# EAGLE board NDS-JOYSTICK (EAGLE 6.4)
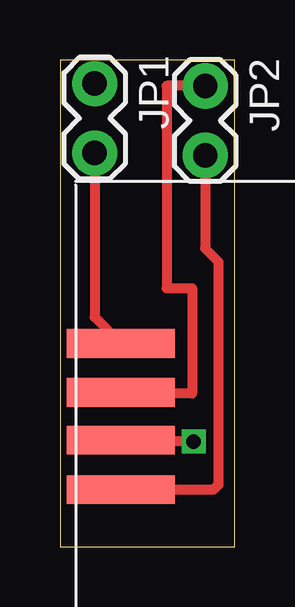
[diagram p0: board, top side]
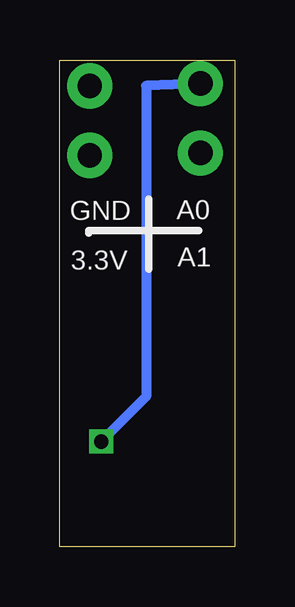
[diagram p1: board, bottom side, seen from below]

Size 7.29 x 20.31 mm. Coordinates in mm from the lower left corner, seen from the top.
Outline: 0,0 7.29,0 7.29,20.31 0,20.31 0,0
Copper layers (1*16): Top 0.035mm / dielectric 1.5mm / Bottom 0.035mm
Design rules "default": minimum track width 10mil, minimum drill 24mil, track to track 8mil, track to pad 8mil, pad to pad 8mil, via to via 8mil, smd to smd 8mil, copper to edge 40mil, drill to drill 8mil, minimum pad ring 10mil, minimum via ring 8mil, stop-mask expansion 4mil, vias tented up to drill 0mil, thermal gap 10mil

## Footprints (pad centres in the part's own frame; a part is rotated, then mirrored left to right if it is on the bottom)
1X02_LOCK = drill 1.016 pad 1.88: 1 -0.178,0; 2 2.718,0
NDS-JOYSTICK = smd 4.5 x 1.2: 3.3V 16.51,12.85; A0 16.51,10.78; A1 16.51,6.75; GND 16.51,8.79

## Placement (x,y rotation side)
JP1  [1X02_LOCK]  1.44,19.15 270 top
JP2  [1X02_LOCK]  6.05,19.05 270 top
U$1  NDS-JOYSTICK  [NDS-JOYSTICK]  19.05,15.24 180 top

## Library data of the parts
JP1 JP2 = SparkFun
U$1 = Random parts

## Nets
3.3V: JP2.2 U$1.3.3V
A0: JP1.1 U$1.A0
A1: JP1.2 U$1.A1
GND: JP2.1 U$1.GND

## Tracks (layer width: path | path; a pad name or v marks a point on that pad's centre or on a via)
3.3V
  Top 0.406: JP2.2 6.05,12.45 6.6,11.9 6.6,2.59 6.4,2.39 U$1.3.3V
A0  (via drill 0.6)
  Top 0.406: v5.57,4.4 2.54,4.4 U$1.A0
  Bottom 0.406: JP1.1 3.7,19.23 3.7,6.27 v5.57,4.4
A1
  Top 0.406: JP1.2 1.44,9.59 U$1.A1
GND
  Top 0.406: JP2.1 4.45,19.23 4.45,10.79 5.5,10.79 5.5,6.4 3.81,6.4 | 3.81,6.4 3.7,6.4 | U$1.GND 3.81,6.45 3.81,6.4

## Text on the board
_bsilk: A0 | GND | A1 | 3.3V